# Altium PCB Alpha-1.PcbDoc
Units mil, origin at the board's own origin, x right, y up, seen from the top; angles counter-clockwise.
Board outline 1449.36 x 708.66 mil, 4 copper layers (Top Layer, GND, POWER, Bottom Layer); 48 components, 47 nets, 200 pads, 92 vias.
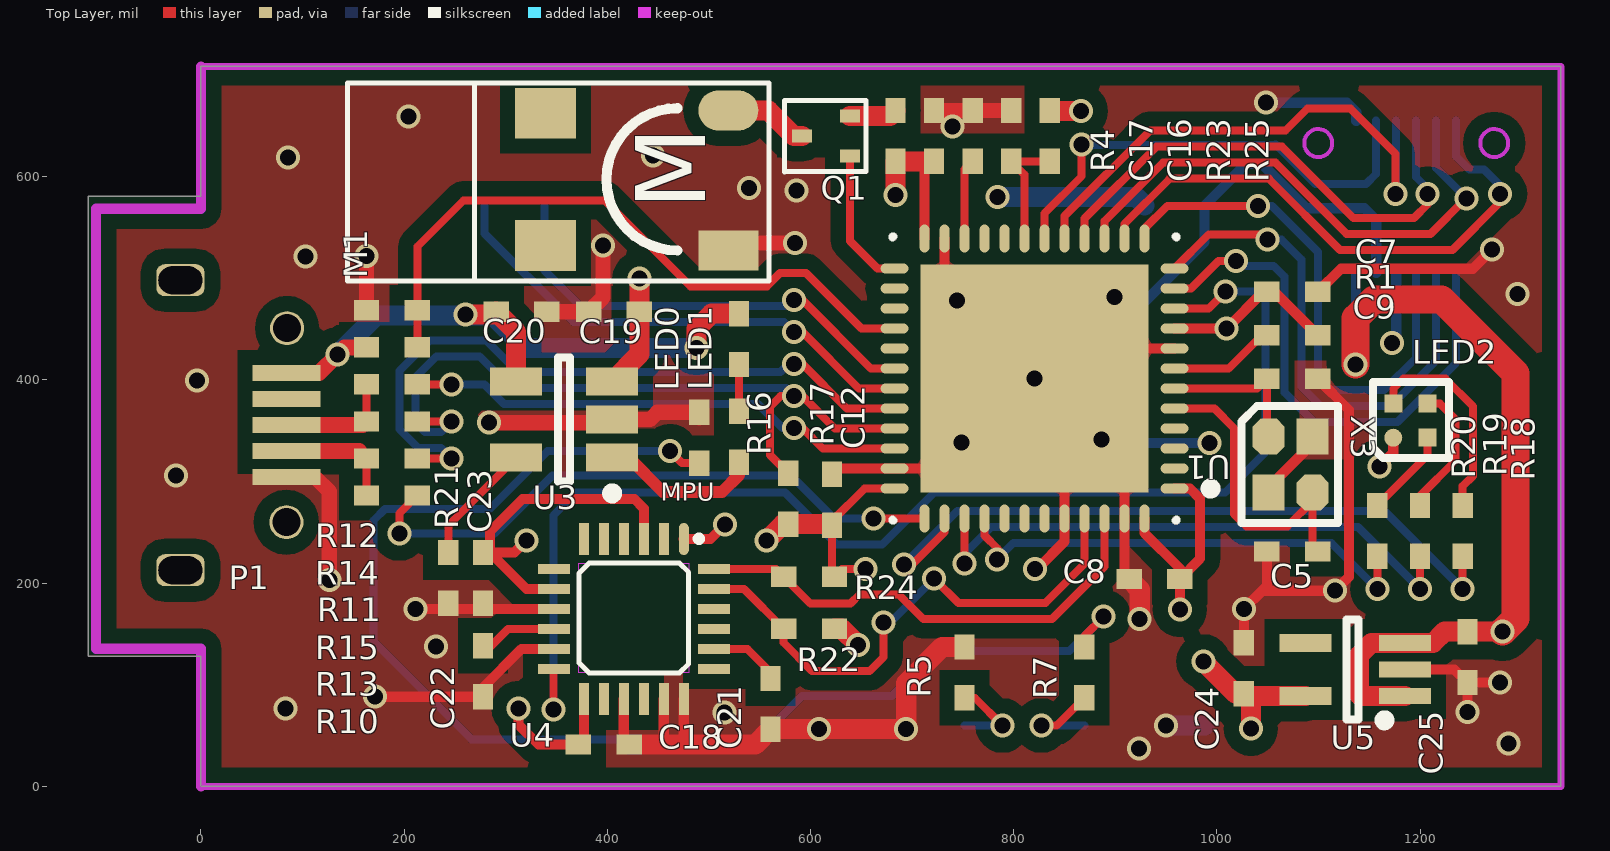
[diagram p0: Top Layer view]
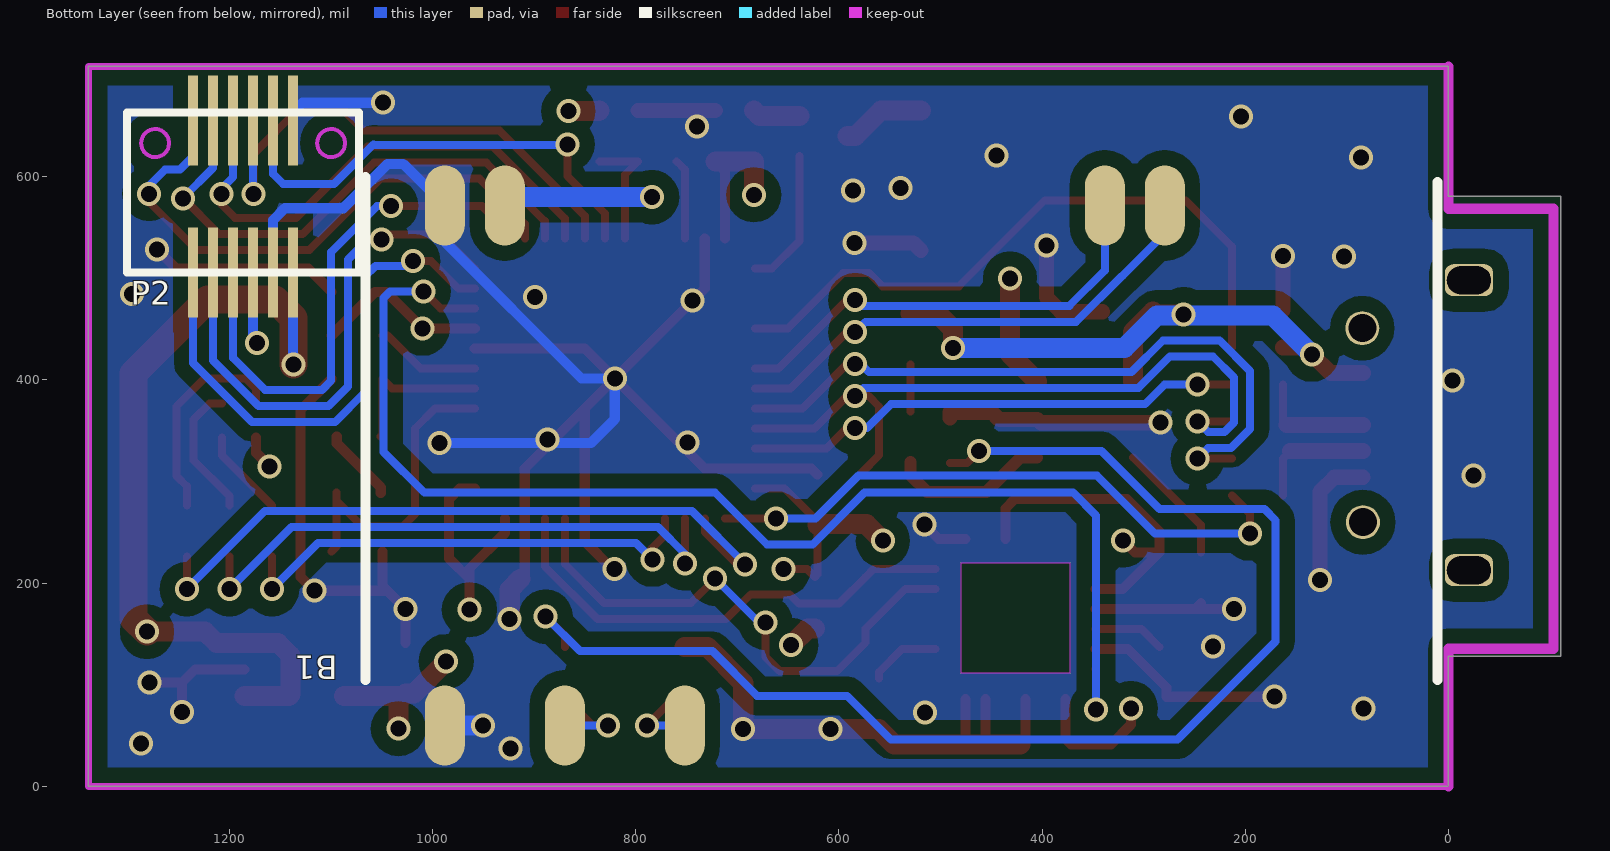
[diagram p1: Bottom Layer view, seen from below]
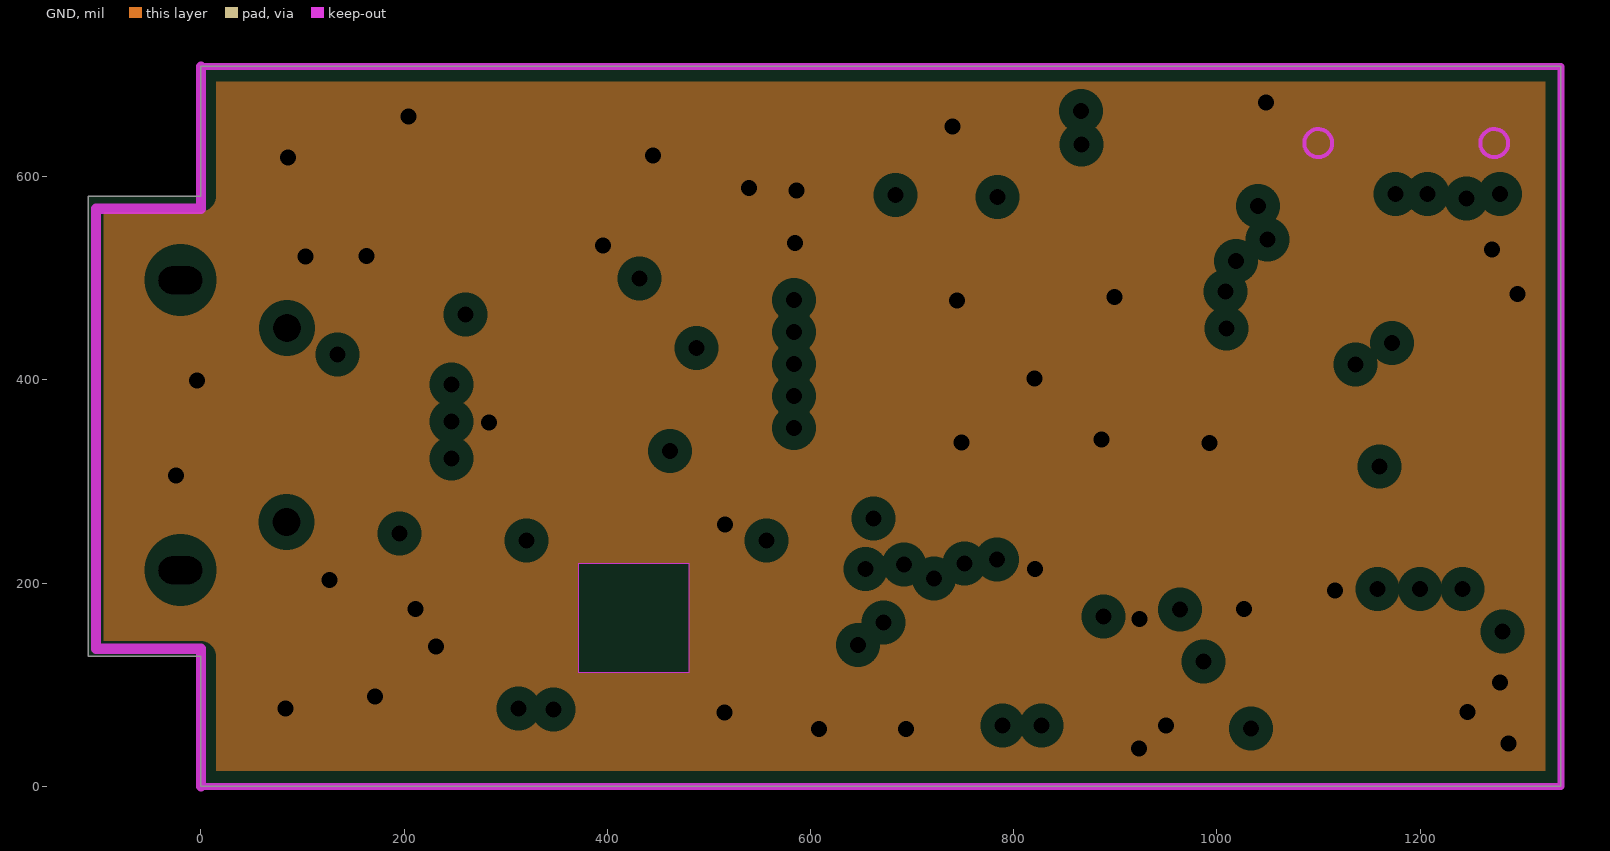
[diagram p2: GND, clearances drawn from the general rule]
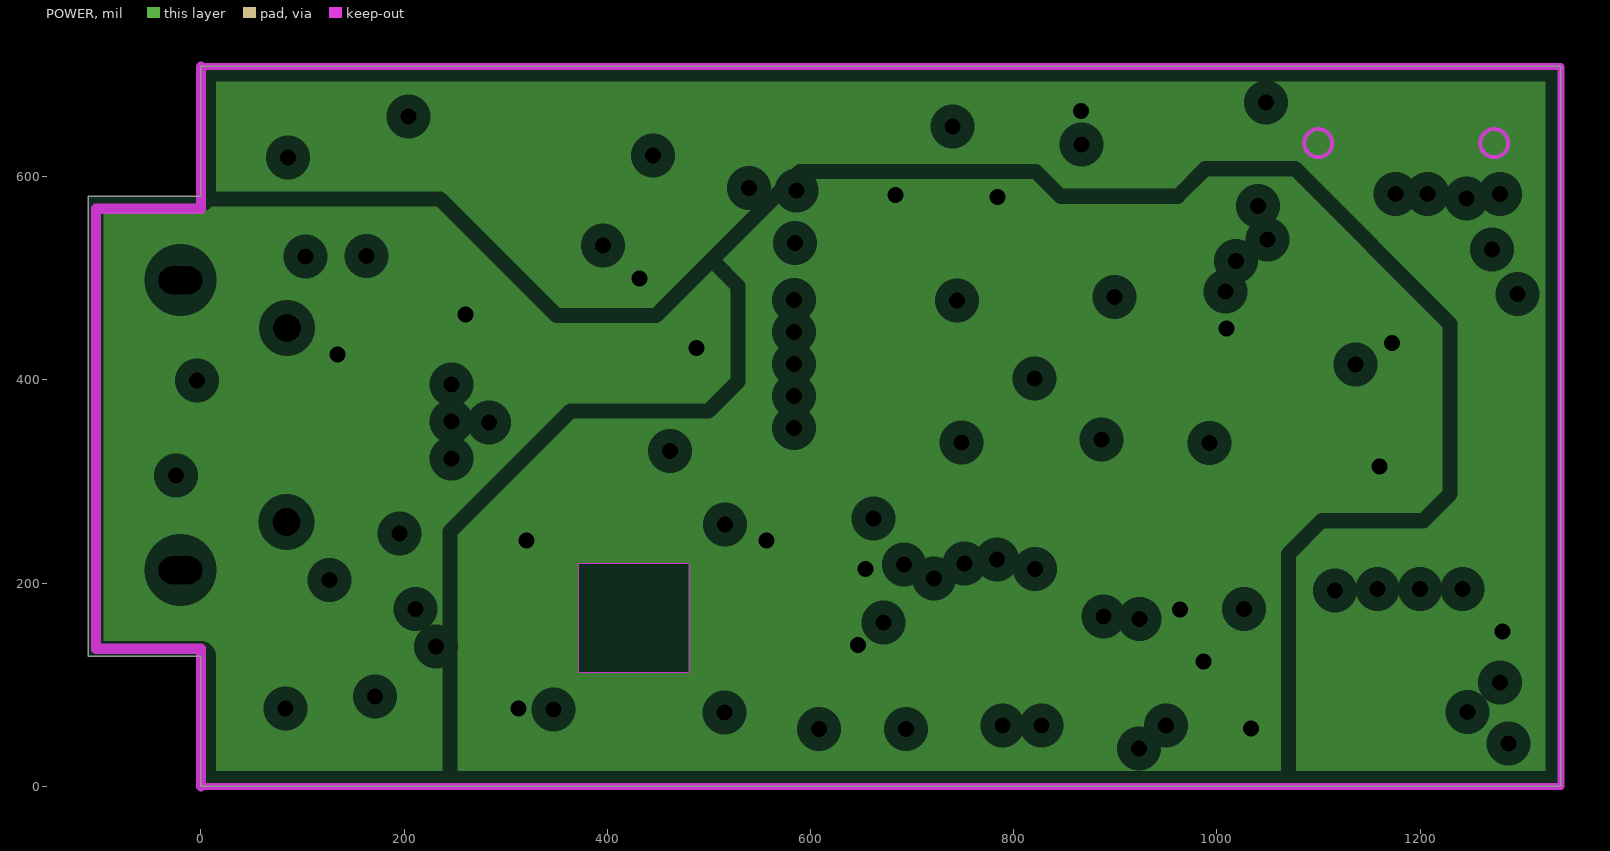
[diagram p3: POWER, clearances drawn from the general rule]

## Layer stack, top to bottom
Top Layer: signal copper 1.4
Dielectric: core 12.6, FR-4, Dk 4.8
GND: plane copper 1.4, net GND
Dielectric: prepreg 12.6, FR-4, Dk 4.8
POWER: plane copper 1.4, net +3.3V
Dielectric: core 12.6, FR-4, Dk 4.8
Bottom Layer: signal copper 1.4

## Board outline
1338.58,-0.12 1338.58,708.54 0,708.54 0,580.78 -110.78,580.78 -110.78,128.02 0,128.02 0,-0.12 1338.58,-0.12

## Design rules (kind name [scope] priority, off if disabled: settings)
AssemblyTestPointUsage [All] p1 off:
AssemblyTestpoint [All] p1 off: testpointundercomponent=TRUE minsize=40 maxsize=100 preferedsize=60 minholesize=0 maxholesize=40 preferedholesize=32 testpointgrid=1 usegrid=TRUE gridtolerance=0.01 allowsidetop=TRUE allowsidebottom=TRUE
Clearance Clearance_1 [InPolygon] p1: gap=15
Clearance [All] p2: gap=7.87
ComponentClearance [All] p1 off: gap=10 collisioncheckmode=3 verticalgap=10 showdistances=FALSE
DiffPairsRouting [All] p1 off: maxlimit=10 minlimit=10 mostfreqgap=10 maxuncoupledlength=500
FabricationTestPointUsage TestPointUsage [All] p1 off: valid=0 allowmultiple=FALSE
FabricationTestpoint Testpoint [(IsPad And (OnTopLayer Or OnBottomLayer))] p1 off: side=3 testpointundercomponent=TRUE minsize=40 maxsize=100 preferedsize=60 minholesize=0 maxholesize=40 preferedholesize=32 testpointgrid=1 allowsidetop=TRUE allowsidebottom=TRUE usegrid=TRUE gridtolerance=0.01
FanoutControl Fanout_BGA [IsBGA] p1 off: bgadir=Out bgaviamode=Centered fanoutstyle=Auto fanoutdirection=Alternating viagrid=1 // Fanout_BGA (Default Rule)
FanoutControl Fanout_LCC [IsLCC] p2 off: bgadir=Out bgaviamode=Centered fanoutstyle=Auto fanoutdirection=Alternating viagrid=1 // Fanout_LCC (Default Rule)
FanoutControl Fanout_SOIC [IsSOIC] p3 off: bgadir=Out bgaviamode=Centered fanoutstyle=Auto fanoutdirection=Alternating viagrid=1 // Fanout_SOIC (Default Rule)
FanoutControl Fanout_Small [(CompPinCount < 5)] p4 off: bgadir=Out bgaviamode=Centered fanoutstyle=Auto fanoutdirection=OutThenIn viagrid=1 // Fanout_Small (Default Rule)
FanoutControl Fanout_Default [All] p5 off: bgadir=Out bgaviamode=Centered fanoutstyle=Auto fanoutdirection=Alternating viagrid=1 // Fanout_Default (Default Rule)
Height [All] p1 off: minheight=0 maxheight=1000 prefheight=500
HoleSize [All] p1 off: absolutevalues=TRUE maxlimit=100 minlimit=1 maxpercent=80.000 minpercent=20.000
HoleToHoleClearance [All] p1 off: gap=5 allowstackedmicrovias=TRUE
LayerPairs [All] p1 off: enforce=TRUE
MinimumSolderMaskSliver [All] p1 off: minsoldermaskwidth=1
NetAntennae [All] p1 off: netantennaetolerance=0
PasteMaskExpansion [All] p1 off: expansion=0
PlaneClearance [All] p1: clearance=13.78
PlaneConnect [All] p1: planeconnectstyle=Direct reliefexpansion=20 reliefentries=4 reliefconductorwidth=10 reliefairgap=10
PolygonConnect PolygonConnect_1 [InPolygon] p1: connectstyle=Relief reliefconductorwidth=12 reliefentries=4 polygonreliefangle="90 Angle" airgapwidth=10
PolygonConnect [All] p2: connectstyle=Direct reliefconductorwidth=10 reliefentries=4 polygonreliefangle="90 Angle" airgapwidth=10
RoutingCorners [All] p1 off: cornerstyle=45-Degree minsetback=100 maxsetback=100
RoutingLayers [All] p1 off: top layer_v5=TRUE bottom layer_v5=TRUE
RoutingPriority [All] p1 off: routingpriority=0
RoutingTopology [All] p1 off: topology=Shortest
RoutingVias [All] p1: holewidth=15.75 width=23.62 viastyle="Through Hole" minholewidth=15.75 minwidth=23.62 maxholewidth=15.75 maxwidth=23.62
SilkToSilkClearance [All] p1 off: silktosilkclearance=0
SilkToSolderMaskClearance SilkscreenOverComponentPads [IsPad] p1 off: minsilkscreentomaskgap=0 clearancetoexposedcopper=TRUE
SolderMaskExpansion [All] p1 off: expansion=4
Width [All] p1: maxlimit=39.37 minlimit=7.87 preferedwidth=7.87
2 further rules are at their usual default settings.

## Components (designator, comment, footprint, x,y, rotation, side; value= is the part's Value field where it differs from the comment)
B1 "Bluetooth" Bluetooth 1068.52,600.11 r270 bottom locked
C5 "" 0402 1099.19,231.09 r180 top
C7 "" 0402 1099.18,486.61 r180 top
C8 "0.1uf" 0402 913.52,204.11 r0 top
C9 "" 0402 1049.18,401.09 r0 top
C12 "0.1uf" 0402 621.19,306.96 r270 top
C16 "" 0402 759.52,665.11 r270 top
C17 "" 0402 721.52,665.11 r270 top
C18 "" 0402 421.52,41.11 r180 top
C19 "" 0402 431.52,467.11 r180 top
C20 "" 0402 290.52,467.11 r0 top
C21 "" 0402 560.52,56.11 r90 top
C22 "" 0402 277.53,88.19 r90 top
C23 "" 0402 277.53,180.11 r90 top
C24 "" 0402 1026.52,141.11 r270 top
C25 "" 0402 1246.52,102.11 r90 top
LED0 "blue" 0402 490.52,318.11 r90 top locked
LED1 "red" 0402 529.52,465.11 r270 top
LED2 "LED3c" Quad4 1173.52,343.11 r90 top locked
M1 "MOTOR" MOTOR 519.14,667.39 r90 top locked
P1 "Header 6" "Micro USB" -20.23,212.67 r90 top locked
P2 "Header 2 * 6" BTB0.5*2*6BOTTOM 1235.52,655.11 r180 bottom locked
Q1 "PNP" SOT532 591.52,640.11 r270 top
R1 "" 0402 1099.18,443.85 r180 top
R4 "" 0402 683.52,665.11 r270 top
R5 "" 0402 751.52,87.11 r90 top
R7 "" 0402 869.52,87.11 r90 top
R10 "" 0402 212.91,286.12 r180 top
R11 "" 0402 212.91,395.55 r180 top
R12 "" 0402 162.91,468.5 r0 top
R13 "" 0402 212.91,322.6 r180 top
R14 "" 0402 162.91,432.03 r0 top
R15 "" 0402 212.91,359.07 r180 top
R16 "" 0402 529.52,319.11 r90 top
R17 "" 0402 578.19,257.96 r90 top
R18 "" 0402 1241.79,226.4 r90 top
R19 "" 0402 1199.79,226.4 r90 top
R20 "" 0402 1157.79,226.4 r90 top
R21 "" 0402 243.52,180.11 r90 top
R22 "" 0402 573.59,155.12 r0 top
R23 "" 0402 797.52,665.11 r270 top
R24 "" 0402 623.52,206.11 r180 top
R25 "" 0402 835.52,665.11 r270 top
U1 "STM32F411" STM32F411-UFQFPN48 820.52,404.11 r180 top locked
U3 "MCP73831" SOT23-5AM 357.52,361.11 r180 top
U4 "MPU9150" MPU9150 426.03,164.62 r270 top
U5 "RT9013 3.3" SC-70-5 1185.95,89.95 r180 top
X3 "" 16mhz 1094.19,344.09 r270 top

## Footprints (in the part's own frame and the unit in brackets; to place one, negate y for a bottom-side part, rotate by r counter-clockwise, add the part's x,y. Pads: shape width x height; smd on the part's side, far side on the other; paste and mask are expansions set on the pad)
16mhz [mm]
  oct 0.9x0.8 smd: 1(0,-1.1) 3(1.4,0)
  rect 0.9x0.8 smd: ""(0,0) ""(1.4,-1.1)
  silkscreen extent -0.76,-1.78 2.16,0.64
0402 [mil]
  rect 25x20 smd: 1(0,0) 2(50,0)
Bluetooth [mm]
  oval 2x1 smd: 1(0.723,20.049) 2(0.723,18.549) 12(0.723,3.549) 13(0.723,2.049) 22(13.723,2.049) 24(13.723,5.049) 26(13.723,8.049)
  silkscreen extent 0.01,0.07 12.59,26.87
BTB0.5*2*6BOTTOM [mm]
  rect 0.25x2.25 smd: 1(0,0) 2(0.5,0) 3(1,0) 4(1.5,0) 5(2,0) 6(2.5,0) 7(2.5,-3.8) 8(2,-3.8) 9(1.5,-3.8) 10(1,-3.8) 11(0.5,-3.8) 12(0,-3.8)
  Keep-Out Layer circle w0.1: c-0.95,-0.56 r0.35
  Keep-Out Layer circle w0.1: c3.45,-0.56 r0.35
  silkscreen extent -1.65,-3.8 4.15,0.21
"Micro USB" [mm]
  rect 0.4x1.7 smd: 1(2.325,-2.65) 2(2.975,-2.65) 3(3.625,-2.65) 4(4.275,-2.65) 5(4.925,-2.65)
  round 0.85 hole 0.7: 6(1.2,-2.65) ""(6.05,-2.667)
  rrect50% 0.8x1.2 hole 0.7 slot 1.1 at 90 deg: ""(0,0) ""(7.25,0)
MOTOR [mil]
  rect 50x60 smd: 0(-135,180) 0(-5,180)
  rect 39.37x59.06 smd: 1(-140,0)
  oval 39.37x59.06 smd: 2(-2.2,0)
  silkscreen extent -170,-40 25,375
MPU9150 [mm] "MPU9150"
  oval 0.8x0.25 smd: 0(-2,1.25)
  rect 0.8x0.25 smd: 1(-2,0.75) 2(-2,0.25) 3(-2,-0.25) 4(-2,-0.75) 5(-2,-1.25) 12(2,-1.25) 13(2,-0.75) 14(2,-0.25) 15(2,0.25) 16(2,0.75) 17(2,1.25)
  rect 0.25x0.8 smd: 6(-1.25,-2) 7(-0.75,-2) 8(-0.25,-2) 9(0.25,-2) 10(0.75,-2) 11(1.25,-2) 18(1.25,2) 19(0.75,2) 20(0.25,2) 21(-0.25,2) 22(-0.75,2) 23(-1.25,2)
  silkscreen extent -2.03,-1.37 1.35,1.65
Quad4 [mm]
  round 0.45 smd: 1(0,0)
  rect 0.45x0.45 smd: 2(0.85,0) 3(0.85,-0.85) 4(0,-0.85)
  silkscreen extent -0.51,-1.4 1.4,0.51
SC-70-5 [mil]
  rect 51.18x16 smd: 1(1,1) 2(1,-25) 3(1,-51)
  rect 51.18x18 smd: 4(99,-51) 5(99,1)
  silkscreen extent 16,-74 59,30
SOT23-5AM [mm] "SOT23, 5-Leads, Body 2.9x1.7mm, Pitch 0.95mm, Lead Span 2.8mm, IPC Low Density"
  rect 1.3x0.7 smd: 1(-1.2,0.95) 2(-1.2,0) 3(-1.2,-0.95) 4(1.2,-0.95) 5(1.2,0.95)
  silkscreen extent -1.33,-1.55 0.15,1.97, body extent -0.9,-1.55 0.9,1.55, height 1.45
SOT532 [mm]
  rect 0.325x0.5 smd: 1(0.5,1.2) 2(-0.5,1.2) 3(0,0)
  silkscreen extent -0.89,-0.43 0.9,1.6
STM32F411-UFQFPN48 [mm]
  oval 0.7x0.25 smd: 1(-3.5,2.82) 2(-3.5,2.32) 3(-3.5,1.82) 4(-3.5,1.32) 5(-3.5,0.82) 6(-3.5,0.32) 7(-3.5,-0.18) 8(-3.5,-0.68) 9(-3.5,-1.18) 10(-3.5,-1.68) 11(-3.5,-2.18) 12(-3.5,-2.68) 25(3.5,-2.68) 26(3.5,-2.18) 27(3.5,-1.68) 28(3.5,-1.18) 29(3.5,-0.68) 30(3.5,-0.18) 31(3.5,0.32) 32(3.5,0.82) 33(3.5,1.32) 34(3.5,1.82) 35(3.5,2.32) 36(3.5,2.82)
  rect 5.7x5.7 smd: 8(0,0.07)
  oval 0.25x0.7 smd: 13(-2.75,-3.43) 14(-2.25,-3.43) 15(-1.75,-3.43) 16(-1.25,-3.43) 17(-0.75,-3.43) 18(-0.25,-3.43) 19(0.25,-3.43) 20(0.75,-3.43) 21(1.25,-3.43) 22(1.75,-3.43) 23(2.25,-3.43) 24(2.75,-3.43) 37(2.75,3.57) 38(2.25,3.57) 39(1.75,3.57) 40(1.25,3.57) 41(0.75,3.57) 42(0.25,3.57) 43(-0.25,3.57) 44(-0.75,3.57) 45(-1.25,3.57) 46(-1.75,3.57) 47(-2.25,3.57) 48(-2.75,3.57)
  silkscreen extent -4.53,-3.48 3.55,3.62, body extent -3.55,-3.48 3.55,3.62, height 0.55

## Part data
C5 C9: library part CAP, "Capacitor"
C7 C8 C12 C16 C17 C18 C21 C22 C23: library part Cap, "Capac"
C19 C20: library part "Cap Pol1", "Polarized Capacitor (Radial)"
C24 C25: library part Cap, "Capacitor"
LED0 LED1: library part LED0, "Typical INFRARED GaAs"
LED2: library part "Header 4", "Header, 4-Pin"
P1: "Header, 6-Pin"
P2: library part "Header 12", "Header, 12-Pin"
Q1: "PNP Bipolar Transistor"
R1 R4 R5 R7 R10 R11 R12 R13 R14 R15 R16 R17 R18 R19 R20 R21 R22 R23 R24 R25: library part Res2, "Resistor"
U3 U5: library part "RT9013 SOT235"
X3: library part CRYSTAL, "Crystal"

## Via types
v1: diameter 23.62, hole 15.75, Top Layer to Bottom Layer, 75 vias
v2: diameter 23.62, hole 15.75, Top Layer to Bottom Layer, tented both sides, 17 vias

## Nets (pads, with @x,y where several pads share a name; then routed paths per layer and width w, separated by ;. In a path a pad name is that pad's centre, name@x,y a point inside that pad or via, vN(x,y) a via of type N, cw(c..) or ccw(c..) an arc to the next point about the centre after c; other vN are vias at no path point)
+3.3V: B1.12 C7.2 C8.2 C12.2 C17.2 C18.2 C23.2 C24.2 LED2.1 P2.9 R1.1 R4.2 R17.1 R22.2 R24.1 U1.1 U1.9 U1.24 U1.36 U1.48 U4.2 U4.7 U4.12 U5.5 | length 1682.6
  Top Layer w7.87: v1(654.3,213.78) 631.19,213.78 R24.1 621.19,208.44 C12.2 621.19,260.98 653.29,293.09 U1.36
  Top Layer w9.84: v1(312.57,76.77) 312.57,60.63 332.09,41.11 C18.2 376.82,46.41 U4.12 ; v1(320.44,242.13) 308.43,230.11 C23.2@284.52,230.11 ; U4.7 320.48,194.15 C23.2@284.52,230.11 ; U4.2 435.87,273.54 426.74,282.68 316.5,282.68 284.52,250.69 C23.2@284.52,230.11 ; U1.24 712.25,605.84 C17.2 ; U1.48 928.79,249.13 963.52,214.4 C8.2 ; U1.1 973.42,293.09 983.43,283.07 983.43,224.02 C8.2 ; v1(963.52,173.79) C8.2
  Top Layer w10: U1.9 v1(1009.59,450.57) 1045.64,486.61 C7.2 1056.42,486.61 R1.1 ; v1(1160.2,314.96) 1173.52,328.28 LED2.1
  Top Layer w19.68: v1(556.66,241.73) 572.89,257.96 R17.1 620.19,257.96 C12.2 ; R22.2 630.68,155.12 v1(646.82,138.98) ; v1(683.52,582.2) R4.2 C17.2 ; v1(986.58,122.83) 1018.31,91.11 C24.2 C24.2@1028.68,88.95 ; v1(1033.43,56.69) 1033.43,84.2 C24.2@1028.68,88.95 ; U5.5 C24.2@1028.68,88.95
  Bottom Layer w10: v1@1172.41,434.25 1176.46,438.31 P2.9
  Bottom Layer w19.68: v1(783.83,579.92) 920.52,579.92 B1.12
  other v1: 1172.41,436.1
+4.2V: C20.1 LED1.1 P1.5 R14.1 U3.4 | length 646.3
  Top Layer w15.75: P1.5 115.98,406.57 v1(134.42,425) 141.44,432.03 R14.1
  Top Layer w19.68: v1(260.6,464.57) 287.98,464.57 C20.1 310.28,447.35 U3.4 ; v1(487.76,431.5) 487.76,450.39 502.48,465.11 LED1.1
  Bottom Layer w19.68: v1(134.42,425) 172.8,463.39 286.98,463.39 318.87,431.5 v1(487.76,431.5)
GND: B1.13 B1.22 C5.2 C7.1 C8.1 C9.2 C12.1 C16.1 C17.1 C18.1 C19.2 C20.2 C21.1 C22.1 C23.1 C24.1 C25.1 LED0.2 M1.1 P1.1 P2.6 P2.8 R5.2 R12.1 R21.1 R23.1 U1.8 U1.23 U1.35 U1.44 U1.47 U3.2 U4.0 U4.8 U4.10 U4.14 U4.16 U4.17 U5.2 X3. | length 4286.7
  Top Layer w10: v1(171.23,88.19) C22.1 277.53,97.24 315.38,135.09 U4.10 ; v1(210.94,174.46) R21.1@249.17,174.46 ; R21.1 R21.1@249.17,174.46 ; U4.8 R21.1@249.17,174.46 ; U4.14 416.19,46.44 C18.1 ; U4.16 455.56,44.97 459.42,41.11 ; U4.17 475.24,44.18 478.32,41.11 ; U4.0 501.6,243.36 v1(515.72,257.48) ; C12.1 627,312.77 U1.35 731.94,312.77 v1(820.52,401.35) ; U1.23 731.94,489.94 v1(820.52,401.35) ; v1(820.83,213.78) 822.8,213.78 850.05,241.02 U1.44 U1.8@850.05,371.83 ; C8.1 909.1,208.53 U1.47 909.1,312.77 U1.8@850.05,371.83 ; U1.8@958.32,430.88 850.05,430.88 v1(820.52,401.35) ; C24.1 v1(1026.52,174.58) 1044.46,192.52 ; C5.2 1049.19,197.25 1044.46,192.52 ; X3.@1050.88,288.97 1050.88,294.22 1094.19,337.53 X3.@1094.19,344.09 ; C9.2 1129.89,370.38 1129.89,206.3 v1(1116.11,192.52) 1044.46,192.52 ; C7.1 1122.02,509.45 1251.94,509.45 v1(1270.83,528.35) ; U5.2 1233.68,114.95 C25.1 ; v1(1246.52,73.13) C25.1 ; v1(1278.46,102.11) C25.1 ; v1(820.52,401.35) U1.8@850.05,371.83
  Top Layer w15: P1.1 112.3,304.2 126.35,290.16 v1(126.35,203.15) ; R12.1 v1(162.91,522) ; v1(283.43,357.87) 401.53,357.87 U3.2 442.18,361.11 449.18,368.11 LED0.2 LED0.2@490.52,362.6 ; C20.2 C19.2 395.64,481.23 v1(395.64,532.28) ; M1.1 526.39,534.65 v1(584.61,534.65) ; C17.1 739.73,665.11 ; v1(739.73,649.61) 739.73,665.11 ; R23.1 C16.1 739.73,665.11
  Top Layer w20: C18.1 459.42,41.11 478.32,41.11 545.52,41.11 C21.1 560.71,56.3 v1(608.24,56.3) v1(694.06,56.3) 694.06,101.57 729.6,137.11 R5.2 ; C8.1 923.98,193.65 v1(923.98,164.57)
  Bottom Layer w10: v1(992.88,337.8) 844.06,337.8 820.52,361.34 v1(820.52,401.35) 853.29,401.35 987.85,535.91 B1.13 1028.8,612.6 1044.06,612.6 1087.76,568.9 1145.24,568.9 1156.78,557.36 P2.8 ; v1(1048.39,672.83) 1127.92,672.83 1137.09,663.66 P2.6
  Bottom Layer w20: v1(949.96,59.83) B1.22
  other v1: 515.32,72.83
  other v2: 923.2,37.4 1286.98,42.13 83.43,76.77 231.46,137.4 -24.79,306.09 748.79,338.19 886.58,341.34 -3.97,399.21 743.92,477.95 899.18,481.5 1295.64,484.65 102.72,521.65 586.19,586.61 539.34,588.98 85.8,618.9 444.85,620.87 204.3,659.06
IIC2_SCL: R22.1 U1.45 U4.22 | length 531.8
  Top Layer w7.87: U4.22 534.56,194.15 R22.1 573.59,141.34 601.54,113.39 658.24,113.39 672.02,127.17 v1@672.02,158.27 ; v1(721.62,204.33) 745.64,180.31 831.05,180.31 869.73,219 U1.45
  Bottom Layer w7.87: v1(672.02,161.02) 678.32,161.02 v1(721.62,204.33)
IIC2_SDA: R24.2 U1.46 U4.23 | length 481.2
  Top Layer w7.87: U4.23 565.8,213.83 R24.2 599.71,179.92 639.34,179.92 648.39,188.98 686.58,188.98 710.99,164.57 837.57,164.57 889.42,216.41 U1.46
LED1: R18.1 U1.38 | length 701.9
  Top Layer w7.87: v1(692.09,218.5) 700.36,218.5 731.94,250.08 U1.38 ; v1(1241.79,194.09) R18.1
  Bottom Layer w7.87: v1(692.09,218.5) 744.46,270.87 1165.02,270.87 v1(1241.79,194.09)
LED2: R19.1 U1.39 | length 570.3
  Top Layer w7.87: v1(751.62,219.37) U1.39 ; v1(1199.79,194.09) R19.1
  Bottom Layer w7.87: v1(751.62,219.37) 751.62,228.82 777.92,255.12 1138.76,255.12 v1(1199.79,194.09)
LED3: R20.1 U1.40 | length 489.1
  Top Layer w7.87: U1.40 771.31,246.77 784.22,233.86 784.22,217.72 783.43,218.5 v1(783.43,223.23) ; v1(1157.79,194.09) R20.1
  Bottom Layer w7.87: v1(783.43,223.23) 799.57,239.37 1112.51,239.37 v1(1157.79,194.09)
LI_BAT1: R23.2 R25.2 U1.19 | length 119.4
  Top Layer w7.87: U1.19 810.68,601.95 R23.2 R25.2
LI_BAT2: R12.2 R14.2 U1.28 | length 650.8
  Top Layer w7.87: R14.2 R12.2 212.91,531.06 258.63,576.77 397.21,576.77 481.86,492.13 557.06,492.13 570.05,505.12 595.64,505.12 650.19,450.57 U1.28
MOTOR_CONTROL: Q1.1 U1.25 | length 138.8
  Top Layer w7.87: Q1.1 638.76,536.8 665.94,509.62 U1.25
NetB1_24: B1.24 R7.1 | length 96.3
  Top Layer w7.87: v1(827.14,59.83) 842.24,59.83 R7.1
  Bottom Layer w7.87: v1(827.14,59.83) B1.24
NetB1_26: B1.26 R5.1 | length 86
  Top Layer w7.87: R5.1 761.66,87.11 v1(788.94,59.83)
  Bottom Layer w7.87: B1.26 v1(788.94,59.83)
NetC16_2: C16.2 U1.22 | length 79.2
  Top Layer w7.87: U1.22 751.62,607.21 C16.2
NetC21_2: C21.2 U4.19 | length 71.4
  Top Layer w7.87: U4.19 537.71,135.09 560.52,112.28 C21.2
NetC22_2: C22.2 U4.9 | length 70.1
  Top Layer w7.87: C22.2@284.52,137.11 302.19,154.78 U4.9
NetLED0_1: LED0.1 R7.2 | length 1319.1
  Top Layer w7.87: v1(461.78,329.92) 473.59,318.11 LED0.1 ; R7.2 869.52,147.9 v1(888.55,166.93)
  Bottom Layer w7.87: v1(461.78,329.92) 341.31,329.92 284.22,272.83 181.07,272.83 170.05,261.81 170.05,142.52 266.5,46.06 548.79,46.06 591.7,88.98 680.28,88.98 724.38,133.07 854.69,133.07 v1(888.55,166.93)
NetLED1_2: LED1.2 R16.2 | length 46
  Top Layer w7.87: R16.2 LED1.2
NetLED2_2: LED2.2 R18.2 | length 210.3
  Top Layer w7.87: LED2.2 1173.52,391.27 1183.43,401.18 1224.77,401.18 1251.94,374.02 1251.94,305.51 1241.79,295.36 R18.2
NetLED2_3: LED2.3 R19.2 | length 133.7
  Top Layer w7.87: R19.2 1199.79,285.65 1235.01,320.87 1235.01,361.02 1219.46,376.57 LED2.3
NetLED2_4: LED2.4 R20.2 | length 87.1
  Top Layer w7.87: R20.2 1206.98,325.6 LED2.4
NetM1_2: M1.2 Q1.3 | length 82.8
  Top Layer w19.68: M1.2 558.4,665.19 583.48,640.11 Q1.3
NetR1_2: R1.2 U1.7 | length 104.4
  Top Layer w7.87: U1.7 1011.56,411.2 1044.21,443.85 R1.2
NetR21_2: R21.2 U3.5 | length 121.2
  Top Layer w7.87: R21.2 243.52,256.95 U3.5
PA13_SWDIO: R11.1 U1.34 | length 495.9
  Top Layer w7.87: R11.1 v1(246.82,395.55) ; v1(583.83,352.54) 591.92,352.54 612,332.46 U1.34
  Bottom Layer w7.87: v1(246.82,395.55) 279.22,395.55 298.39,376.38 548.39,376.38 572.24,352.54 v1(583.83,352.54)
PA14_SWCLK: R10.1 U1.37 | length 602.9
  Top Layer w7.87: v1(195.24,248.82) 195.24,268.45 R10.1 ; v1(661.95,263.56) U1.37
  Bottom Layer w7.87: v1(195.24,248.82) 288.94,248.82 346.1,305.98 580.61,305.98 623.02,263.56 v1(661.95,263.56)
UART1_RX: B1.1 U1.31 | length 494.2
  Top Layer w7.87: v1(583.83,447.02) 591.92,447.02 647.43,391.51 U1.31
  Bottom Layer w7.87: B1.1 279.19,544.18 321,502.36 321.4,502.36 366.6,457.16 573.69,457.16 v1(583.83,447.02)
UART1_TX: B1.2 U1.30 | length 453
  Top Layer w7.87: v1(583.83,478.52) 591.92,478.52 659.24,411.2 U1.30
  Bottom Layer w7.87: B1.2 338.24,507.79 373.13,472.91 578.21,472.91 v1(583.83,478.52)
USB_D+: R15.1 R17.2 U1.33 | length 733
  Top Layer w7.87: R15.1 v1(246.82,359.07) ; R17.2 560.2,325.94 560.2,373.62 570.61,384.03 v1(583.83,384.03) 591.92,384.03 623.81,352.14 U1.33
  Bottom Layer w7.87: v1(246.82,359.07) 236.45,348.71 220.44,348.71 210.99,358.16 210.99,402.36 231.86,423.23 274.15,423.23 305.26,392.13 575.73,392.13 v1(583.83,384.03)
USB_D-: R13.1 U1.32 | length 688.9
  Top Layer w7.87: R13.1 v1(246.82,322.6) ; v1(583.83,415.53) 591.92,415.53 635.62,371.83 U1.32
  Bottom Layer w7.87: v1(246.82,322.6) 236.45,332.96 213.92,332.96 195.24,351.64 195.24,408.89 225.34,438.98 280.68,438.98 311.78,407.87 570.44,407.87 578.09,415.53 v1(583.83,415.53)
USB_PORT2: P1.2 R10.2 R13.2 | length 118.3
  Top Layer w7.87: R13.2@155.72,329.8 R13.2 R10.2
  Top Layer w15.75: P1.2 R13.2@155.72,329.8
USB_PORT3: P1.3 R11.2 R15.2 | length 116.8
  Top Layer w7.87: R15.2@159.22,355.39 R15.2 R11.2
  Top Layer w15.75: P1.3 R15.2@159.22,355.39
USB_PORT4: P1.4
V1: P2.10 U1.13 | length 532.4
  Top Layer w7.87: U1.13 928.79,548.9 951.15,571.26 v1(1040.52,571.26)
  Bottom Layer w7.87: v1(1040.52,571.26) 1054.3,571.26 1099.57,525.98 1099.57,399.27 1108.68,390.16 1164.54,390.16 1196.15,421.77 P2.10
V2: P2.11 U1.12 | length 519.5
  Top Layer w7.87: U1.12 992,543.31 1044.85,543.31 v1(1049.97,538.19)
  Bottom Layer w7.87: v1(1049.97,538.19) 1063.35,538.19 1083.04,518.5 1083.04,393.53 1102.16,374.41 1171.06,374.41 1215.83,419.19 P2.11
V3: P2.12 U1.11 | length 533.5
  Top Layer w7.87: U1.11 974.55,489.94 1001.54,516.93 v1(1018.87,516.93)
  Bottom Layer w7.87: v1(1018.87,516.93) 1023.59,512.2 1055.87,512.2 1066.5,501.57 1066.5,387.8 1095.64,358.66 1177.58,358.66 1235.52,416.6 P2.12
V4: P2.1 U1.14 | length 557.6
  Top Layer w7.87: U1.14 909.1,553.61 953.53,598.03 1051.05,598.03 1121.13,527.95 1231.86,527.95 1278.71,574.8 v1(1278.71,583.07)
  Bottom Layer w7.87: P2.1 1235.52,619.96 1248.39,607.09 1262.96,607.09 1278.71,591.34 v1(1278.71,583.07)
V5: P2.2 U1.15 | length 531.6
  Top Layer w7.87: U1.15 889.42,556.19 947,613.78 1057.57,613.78 1127.65,543.7 1210.2,543.7 v1@1245.44,578.94 ; v1(1245.64,578.74) v1@1248,578.74
  Bottom Layer w7.87: P2.2 1215.83,608.54 v1(1245.64,578.74)
V6: P2.3 U1.16 | length 508.4
  Top Layer w7.87: U1.16 869.73,558.78 940.48,629.53 1064.09,629.53 1134.17,559.45 1194.06,559.45 1207.45,572.83 v1(1207.45,583.07)
  Bottom Layer w7.87: P2.3 1196.15,599.49 1207.96,587.68 v1@1207.96,583.11
V7: P2.4 U1.17 | length 521.6
  Top Layer w7.87: U1.17 850.05,561.37 933.96,645.28 1067.29,645.28 1088.94,666.93 1131.46,666.93 1175.95,622.44 v1(1175.95,583.07)
  Bottom Layer w7.87: v1@1176.46,583.11 P2.4
V8: P2.5 U1.18 | length 473
  Top Layer w7.87: U1.18 830.36,563.95 866.9,600.49 v1(866.9,631.89)
  Bottom Layer w7.87: v1(866.9,631.89) 866.11,631.1 1058.63,631.1 ; 1057.84,631.89 1058.63,631.1 ; P2.5 1156.78,602.87 1146.82,592.91 1096.82,592.91 1058.63,631.1
VIN_CGE: R16.1 U3.1 | length 158.5
  Top Layer w11.81: U3.1 420.75,323.71 454.69,289.76 512.96,289.76 529.52,306.32 R16.1
VIN_SENSE: C19.1 C25.2 P2.7 R25.1 U3.3 U5.1 U5.3 | length 968.7
  Top Layer w19.68: U3.3 431.52,425.27 C19.1 v1(431.52,499.55) ; R25.1 836.06,664.57 v1(866.11,664.57) ; U5.1 1141.33,88.95 1139.73,90.55 1139.73,128.74 1151.95,140.95 U5.3 1212.57,140.95 1223.73,152.11 C25.2 v1(1280.93,152.11)
  Top Layer w27.56: v1(1136.58,415.35) 1136.58,461.02 1154.69,479.13 1221.23,479.13 1294.06,406.3 1294.06,165.24 v1(1280.93,152.11)
  Bottom Layer w9.84: v1(1136.58,415.35) 1137.09,415.87 P2.7
VIN_TRIP: Q1.2 R4.1 | length 47
  Top Layer w19.68: Q1.2 678.2,659.8 R4.1
WKUP: U1.10 U4.11 | length 1251.3
  Top Layer w7.87: v1(346.82,75.59) 346.82,114.94 U4.11 ; U1.10 991.87,470.25 v1(1008.63,487.01)
  Bottom Layer w7.87: v1(346.82,75.59) 346.82,266.54 369.33,289.05 574.7,289.05 625.95,237.8 670.44,237.8 721.62,288.98 1007.84,288.98 1048,329.13 1048,480.71 1041.7,487.01 v1(1008.63,487.01)
X1_OUT1: C5.1 U1.5 X3.3 | length 303.5
  Top Layer w7.87: U1.5 997.43,371.83 1016.9,352.36 1016.9,268.11 1029.1,255.91 1069.26,255.91 X3.3@1094.19,280.83 ; X3.3 X3.3@1094.19,280.83 ; C5.1 1094.19,236.09 X3.3@1094.19,280.83
X1_OUT2: C9.1 U1.6 X3.1 | length 152.5
  Top Layer w7.87: U1.6 1039.61,391.51 C9.1 1049.18,345.79 X3.1
pads on no net: M1.0 P1. P1.6 U1.2 U1.3 U1.4 U1.20 U1.21 U1.26 U1.27 U1.29 U1.41 U1.42 U1.43 U4.1 U4.3 U4.4 U4.5 U4.6 U4.13 U4.15 U4.18 U4.20 U4.21 U5.4

## Polygon pours and split planes (outlines as drawn)
GND on Top Layer "Mechanical1-No Net" (solid, remove dead copper, pour order 2): -189.8,794.49 1475.95,794.49 1475.95,257.09 1475.95,-135.04 -189.8,-135.04
GND on Bottom Layer "Mechanical1-No Net" (solid, remove dead copper, pour order 4): -212.63,764.17 1412.57,764.17 1412.57,338.58 1412.57,-129.92 -222.87,-129.92
GND on GND (split plane): 1323.51,14.95 15.07,14.95 15.07,128.02 14.78,130.96 13.93,133.79 12.53,136.4 10.66,138.68 8.37,140.56 5.77,141.95 2.94,142.81 0,143.1 -95.71,143.1 -95.71,565.71 0,565.71 2.94,566 5.77,566.85 8.37,568.25 10.66,570.12 12.53,572.41 13.93,575.01 14.78,577.84 15.07,580.78 15.07,693.47 1323.51,693.47
VIN_SENSE on POWER (split plane): 1323.51,14.95 1078.01,14.95 1078.01,225.61 1106.25,253.85 1203.12,253.85 1205.08,254.11 1206.9,254.87 1208.47,256.07 1234.84,282.45 1234.85,282.45 1236.05,284.01 1236.8,285.84 1237.06,287.8 1237.06,455.12 1236.8,457.08 1236.36,458.14 1236.05,458.9 1234.85,460.47 1234.84,460.47 1082.09,613.22 1080.52,614.43 1079.77,614.74 1078.7,615.18 1076.74,615.44 988.55,615.44 986.59,615.18 984.77,614.43 983.2,613.22 958.25,588.27 849.17,588.27 826.97,610.47 825.4,611.67 824.65,611.98 823.58,612.43 821.62,612.68 589.73,612.68 587.77,612.43 585.95,611.67 584.38,610.47 444.87,470.95 353.1,470.95 240.75,583.3 239.18,584.5 237.36,585.26 235.4,585.52 15.07,585.52 15.07,693.47 1323.51,693.47
+3.3V on POWER (split plane): 1221.93,451.98 1221.93,290.93 1199.98,268.98 1103.12,268.98 1101.16,268.72 1099.34,267.97 1097.77,266.77 1065.09,234.09 1063.89,232.52 1063.13,230.7 1062.88,228.74 1062.88,14.95 252.81,14.95 252.81,247.65 366.88,361.73 499.57,361.73 501.53,361.98 503.36,362.74 504.92,363.94 534.06,393.08 535.26,394.64 536.02,396.47 536.27,398.43 536.27,492.13 536.02,494.08 535.26,495.91 534.06,497.48 513.42,518.11 592.87,597.55 818.49,597.55 840.68,575.36 842.25,574.16 844.07,573.4 846.03,573.14 961.39,573.14 963.34,573.4 965.17,574.16 966.73,575.36 991.68,600.31 1073.61,600.31
+4.2V on POWER (split plane): 344.62,458.04 346.19,456.83 346.94,456.52 348.01,456.08 349.97,455.82 448,455.82 449.96,456.08 451.78,456.83 453.35,458.04 502.72,507.41 521.14,488.99 521.14,401.56 496.44,376.86 363.75,376.86 361.79,376.6 360.72,376.16 359.97,375.84 358.4,374.64 239.9,256.14 238.69,254.57 237.94,252.75 237.68,250.79 237.68,14.95 15.07,14.95 15.07,128.02 14.78,130.96 13.93,133.79 12.53,136.4 10.66,138.68 8.37,140.56 5.77,141.95 2.94,142.81 0,143.1 -95.71,143.1 -95.71,565.71 0,565.71 2.94,566 5.77,566.85 8.37,568.25 10.66,570.12 10.88,570.39 232.27,570.39

## Keep-outs
Keep-Out Layer:
  pour cut-out: 480.03,219.62 480.03,111.62 372.03,111.62 372.03,219.62
  lines w7: 0,-0.12 1338.58,-0.12 1338.58,216.42 1338.58,708.54 0,708.54
  lines w10: 0,-0.12 0,135.35 -103.45,135.35 -103.45,568.43 0,568.43 0,708.54

## Other copper
POWER (plane layer: these items are gaps in the copper):
  pour cut-out: 480.03,219.62 480.03,111.62 372.03,111.62 372.03,219.62
  lines w15: -6.33,577.95 235.4,577.95 349.97,463.39 448,463.39 589.73,605.12 821.62,605.12 846.03,580.71 961.39,580.71 988.55,607.87 1076.74,607.87 1229.5,455.12 1229.5,287.8 1203.12,261.42 1103.12,261.42 1070.44,228.74 1070.44,4.72 ; 245.24,6.3 245.24,250.79 363.75,369.29 499.57,369.29 528.71,398.43 528.71,492.13 504.3,516.54
GND (plane layer: these items are gaps in the copper):
  pour cut-out: 480.03,219.62 480.03,111.62 372.03,111.62 372.03,219.62

## Text inside footprints (layer, text, board x,y; h text height)
M1: Top Overlay "M" at 519.14,567.39 h118.11 r90
U4: Top Overlay "MPU" at 452.72,275.2 h30